# Altium PCB g96-44.PcbDoc
Units mil, origin at the board's own origin, x right, y up, seen from the top; angles counter-clockwise.
Board outline 8107 x 3936 mil, 2 copper layers (Top Layer, Bottom Layer); 65 components, 89 nets, 238 pads, 0 vias.
Unrouted connection lines stored in the file: 39.
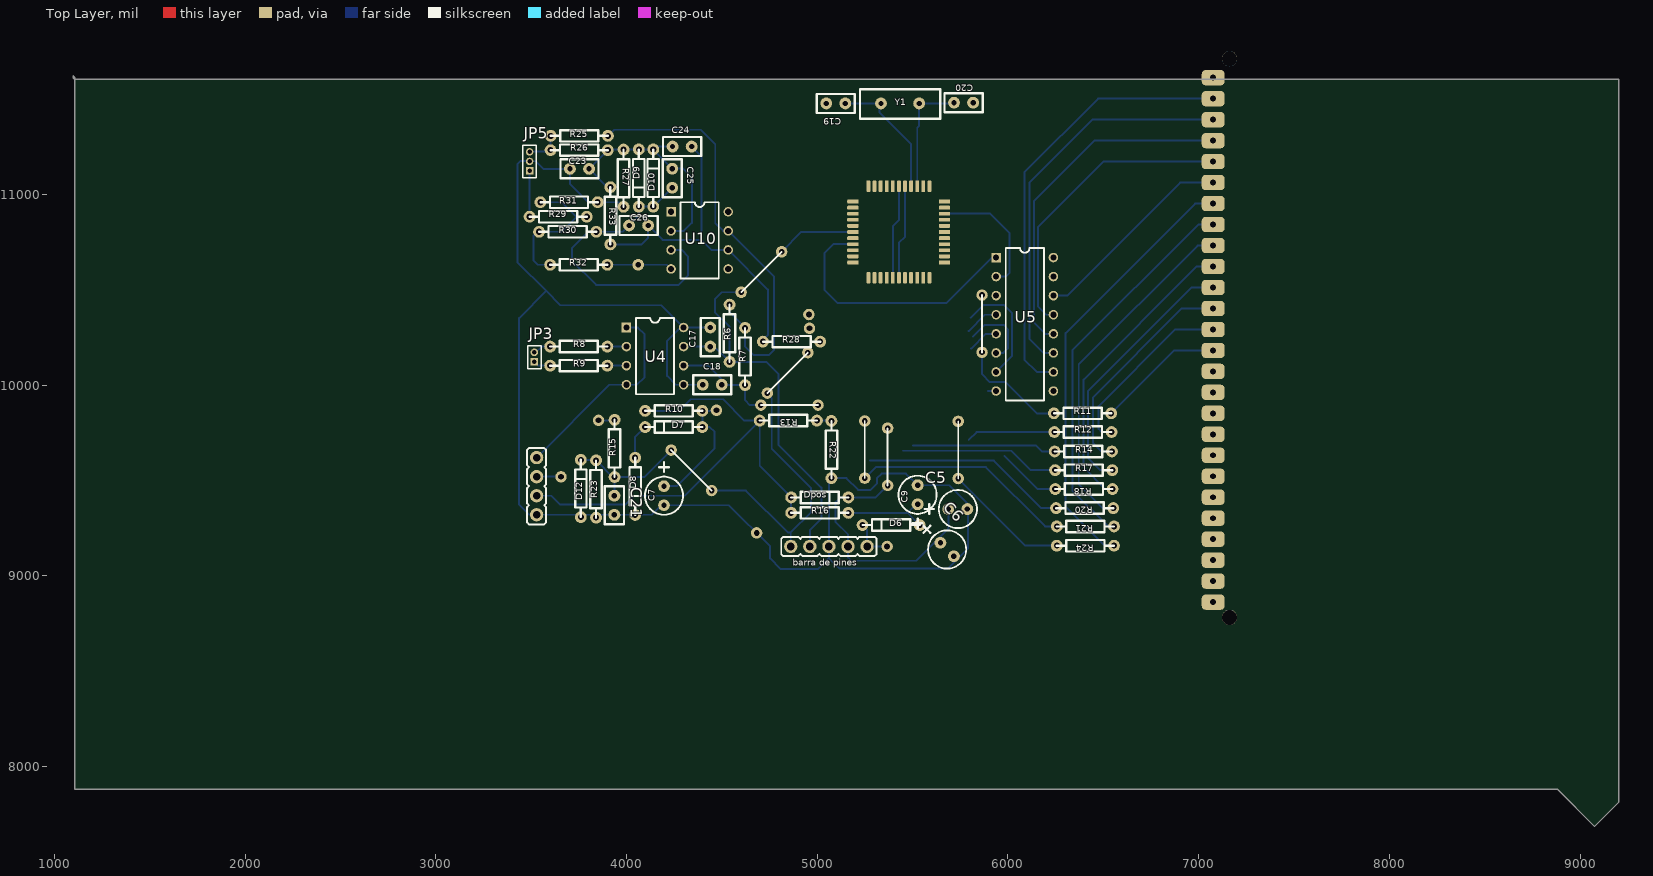
[diagram p0: Top Layer view]
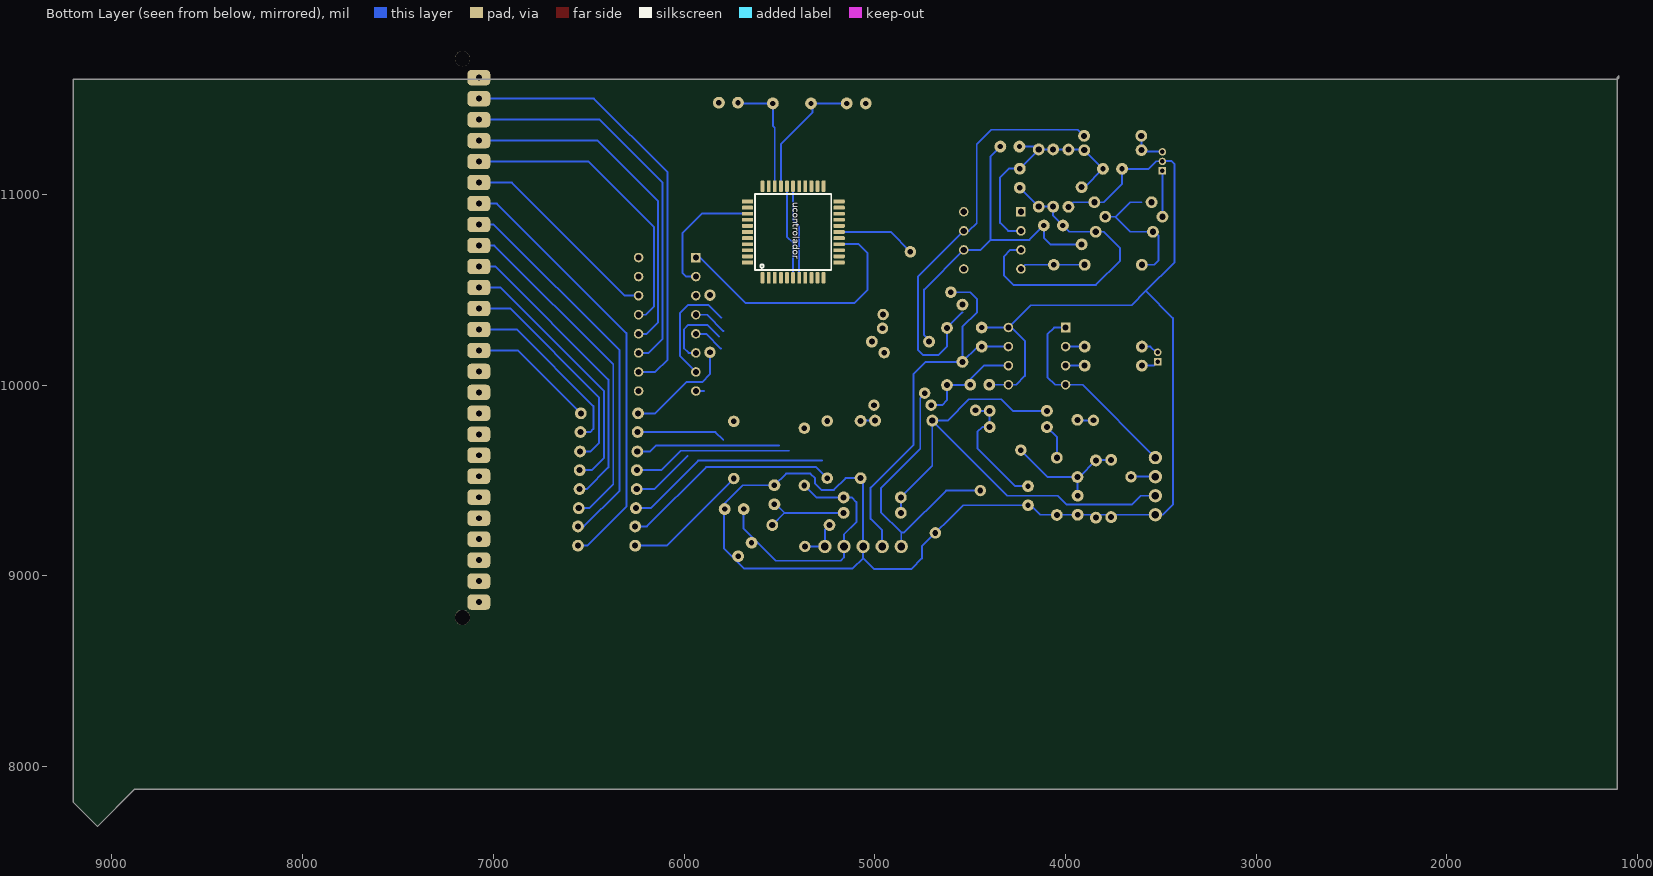
[diagram p1: Bottom Layer view, seen from below]

## Layer stack, top to bottom
Top Layer: signal copper 1.4
Dielectric: dielectric 12.6, FR-4, Dk 4.8
Bottom Layer: signal copper 1.4

## Board outline
1097,11622 1106,11613 1106,7882 8880,7882 9076,7686 9204,7814 9204,11603 1106,11603 1097,11612

## Design rules (kind name [scope] priority, off if disabled: settings)
Clearance [All] p1: gap=10
PolygonConnect [All] p1: connectstyle=Relief reliefconductorwidth=10 reliefentries=4 polygonreliefangle="90 Angle"
RoomDefinition N96P96copia [InComponentClass('N96P96copia')] p1: confinementstyle=ConfineIn formatcopy=TRUE lockcomponents=FALSE outline 7050,1425 30445,1425 30445,5360 7050,5360
RoutingVias [All] p1: holewidth=28 width=50 viastyle="Through Hole" minholewidth=28 minwidth=50 maxholewidth=28 maxwidth=50
SilkscreenOverComponentPads [All] p1: minsilkscreentomaskgap=10
SolderMaskExpansion [All] p1: expansion=4
TestPointUsage [All] p1: valid=0 allowmultiple=FALSE
Testpoint [All] p1: side=15 testpointundercomponent=TRUE minsize=40 maxsize=100 preferedsize=60 minholesize=0 maxholesize=40 preferedholesize=32 testpointgrid=1 style=1023 order=0-112345678
Width [All] p1: maxlimit=10 minlimit=10 preferedwidth=10
23 further rules are at their usual default settings.

## Components (designator, comment, footprint, x,y, rotation, side; value= is the part's Value field where it differs from the comment)
* "*" "Bornera N96" 7075,8860 r180 top
"barra de pines" "Bornera 5 pines" "barra de pines 1 x 5" 5261,9154 r180 top
C5 "10uFX16V" "CAP 5MM" 5737,9350 r0 top
C6 "10uFX16V" "CAP 5MM" 5681,9138 r315 top
C7 "2.2uFX16V" "CAP 5MM" 4196,9420 r270 top
C9 "1uFX100V" "CAP 5MM" 5526,9425 r90 top
C17 ".1uF" RAD0.1 4439,10202 r90 top
C18 ".1uF" RAD0.1 4499,10002 r180 top
C19 "27pF" RAD0.1 5147,11477 r180 top
C20 "27pF" RAD0.1 5717,11481 r0 top
C21 ".1uF" RAD0.1 3936,9420 r270 top
C23 ".1uF" RAD0.1 3803,11134 r180 top
C24 "47pF" RAD0.1 4241,11251 r0 top
C25 ".1uF" RAD0.1 4239,11135 r270 top
C26 "47pF" RAD0.1 4013,10837 r0 top
D6 "1N4148" "DIODE 0.3" 5537,9266 r180 top
D7 "1N4148" "DIODE 0.3" 4397,9780 r180 top
D8 "1N4148" "DIODE 0.3" 4045,9619 r270 top
D9 "1N4148" "DIODE 0.3" 4064,11236 r270 top
D10 "1N4148" "DIODE 0.3" 4140,10936 r90 top
D12 "4V7" "DIODE 0.3" 3760,9308 r90 top
Dpos "DIODE" "DIODE 0.3" 4863,9411 r0 top
JP3 "MHDR1X2" MHDR1X2 3516,10122 r90 top
JP5 "MHDR1X3" MHDR1X3 3491,11123 r90 top
R6 "10K" AXIAL0.3 4540,10122 r90 top
R7 "10K" AXIAL0.3 4621,10000 r90 top
R8 "1K" AXIAL0.3 3599,10202 r0 top
R9 "1K" AXIAL0.3 3599,10102 r0 top
R10 "*" AXIAL0.3 4397,9865 r180 top
R11 "*" AXIAL0.3 6241,9852 r0 top
R12 "*" AXIAL0.3 6243,9754 r0 top
R13 "*" AXIAL0.3 4998,9814 r180 top
R14 "*" AXIAL0.3 6245,9652 r0 top
R15 "*" AXIAL0.3 3937,9518 r90 top
R16 "*" AXIAL0.3 5163,9330 r180 top
R17 "*" AXIAL0.3 6247,9554 r0 top
R18 "*" AXIAL0.3 6248,9455 r0 top
R20 "*" AXIAL0.3 6252,9355 r0 top
R21 "*" AXIAL0.3 6256,9259 r0 top
R22 "*" AXIAL0.3 5074,9512 r90 top
R23 "*" AXIAL0.3 3840,9305 r90 top
R24 "*" AXIAL0.3 6256,9158 r0 top
R25 "*" AXIAL0.3 3602,11307 r0 top
R26 "*" AXIAL0.3 3901,11232 r180 top
R27 "*" AXIAL0.3 3984,10935 r90 top
R28 "*" AXIAL0.3 4715,10228 r0 top
R29 "*" AXIAL0.3 3491,10883 r0 top
R30 "*" AXIAL0.3 3541,10804 r0 top
R31 "*" AXIAL0.3 3548,10959 r0 top
R32 "*" AXIAL0.3 3899,10631 r180 top
R33 "*" AXIAL0.3 3915,11038 r270 top
U4 "CNY74-2" DIP8 3999,10302 r0 top
U5 "ULN2003" DIP16 5938,10669 r0 top
U10 "OP07" DIP8 4233,10909 r0 top
ucontrolador "PIC16F887" PIC16F887 5588,10563 r180 bottom
Y1 "4MHz" XTAL1 5334,11477 r0 top
? "Comment" "JUMPER 300" 5739,9510 r90 top
? "Comment" "JUMPER 300" 5249,9512 r90 top
? "Comment" "JUMPER 300" 5864,10172 r90 top
? "Comment" "JUMPER 300" 5004,9895 r180 top
? "Comment" "JUMPER 300" 5369,9774 r270 top
? "Comment" "JUMPER 300" 4601,10487 r45 top
? "Comment" "BARRA DE PINES 1 X 4" 3528,9620 r270 top
? "Comment" "JUMPER 300" 4738,9958 r45 top
? "Comment" "JUMPER 300" 4446,9447 r135 top

## Footprints (in the part's own frame and the unit in brackets; to place one, negate y for a bottom-side part, rotate by r counter-clockwise, add the part's x,y. Pads: shape width x height; smd on the part's side, far side on the other; paste and mask are expansions set on the pad)
AXIAL0.3 [mil]
  round 62 hole 32: 1(0,0) 2(300,0)
  silkscreen extent 0,-30 300,30
"BARRA DE PINES 1 X 4" [mil]
  round 70 hole 40: 1(0,0) 2(100,0) 3(200,0) 4(300,0)
  silkscreen extent -50,-50 350,50
"barra de pines 1 x 5" [mil]
  round 70 hole 40: 1(0,0) 2(100,0) 3(200,0) 4(300,0) 5(400,0)
  silkscreen extent -50,-50 450,50
"Bornera N96" [mil]
  rrect50% 120x80 hole 31: 1(-1,-2) 2(-1,-112) 3(-1,-222) 4(-1,-332) 5(-1,-442) 6(-1,-552) 7(-1,-662) 8(-1,-772) 9(-1,-882) 10(-1,-992) 11(-1,-1102) 12(-1,-1212) 13(-1,-1322) 14(-1,-1432) 15(-1,-1542) 16(-1,-1652) 17(-1,-1762) 18(-1,-1872) 19(-1,-1982) 20(-1,-2092) 21(-1,-2202) 22(-1,-2312) 23(-1,-2422) 24(-1,-2532) 25(-1,-2642) 26(-1,-2752)
"CAP 5MM" [mil]
  round 62 hole 28: 1(-50,0) 2(50,0)
  silkscreen extent -175,-100 100,100
"DIODE 0.3" [mil]
  round 62 hole 32: 1(0,0) 2(300,0)
  silkscreen extent 0,-30 300,30
DIP8 [mil]
  rect 50x50 hole 32: 1(0,0)
  round 50 hole 32: 2(0,-100) 3(0,-200) 4(0,-300) 5(300,-300) 6(300,-200) 7(300,-100) 8(300,0)
  silkscreen extent 50,-350 250,50
DIP16 [mil]
  rect 50x50 hole 32: 1(0,0)
  round 50 hole 32: 2(0,-100) 3(0,-200) 4(0,-300) 5(0,-400) 6(0,-500) 7(0,-600) 8(0,-700) 9(300,-700) 10(300,-600) 11(300,-500) 12(300,-400) 13(300,-300) 14(300,-200) 15(300,-100) 16(300,0)
  silkscreen extent 50,-750 250,50
"JUMPER 300" [mil]
  round 60 hole 30: 1(0,0) 2(300,0)
  silkscreen extent 0,0 300,0
MHDR1X2 [mm] "Connector; Header; 2 Position"
  rect 1x1 hole 0.6: 1(0,0)
  round 1 hole 0.6: 2(1.27,0)
  silkscreen extent -0.9,-0.9 2.17,0.9
MHDR1X3 [mm] "Connector; Header; 3 Position"
  rect 1x1 hole 0.6: 1(0,0)
  round 1 hole 0.6: 2(1.27,0) 3(2.54,0)
  silkscreen extent -0.9,-0.9 3.44,0.9
PIC16F887 [mil]
  rrect50% 20x60 all layers, no hole: 1(0,0) 2(32,0) 3(64,0) 4(96,0) 5(128,0) 6(160,0) 7(192,0) 8(224,0) 9(256,0) 10(288,0) 11(320,0) 23(320,480) 24(288,480) 25(256,480) 26(224,480) 27(192,480) 28(160,480) 29(128,480) 30(96,480) 31(64,480) 32(32,480) 33(0,480)
  rrect50% 60x20 all layers, no hole: 12(401,80) 13(401,112) 14(401,144) 15(401,176) 16(401,208) 17(401,240) 18(401,272) 19(401,304) 20(401,336) 21(401,368) 22(401,400) 34(-79,400) 35(-79,368) 36(-79,336) 37(-79,304) 38(-79,272) 39(-79,240) 40(-79,208) 41(-79,176) 42(-79,144) 43(-79,112) 44(-79,80)
  silkscreen extent -40,40 360,440
RAD0.1 [mil]
  round 62 hole 28: 1(0,0) 2(100,0)
  silkscreen extent -50,-50 150,50
XTAL1 [mil]
  round 62 hole 28: 1(0,0) 2(200,0)
  silkscreen extent -110,-80 310,75

## Part data
* "barra de pines": library part PIC16F887
C5 C6 C7 C9: library part CAPACITOR, "Capacitor"
C17 C18 C19 C20 C21 C23 C24 C25 C26: library part CAP
D6 D7 D8 D9 D10: library part DIODE, "Diode"
D12: library part ZENER3, "Diodo Zener"
Dpos: "Diode"
JP3: "Header, 2-Pin"
JP5: "Header, 3-Pin"
R6 R7 R8 R9 R10 R11 R12 R13 R14 R15 R16 R17 R18 R20 R21 R22 R23 R24 R25 R26 R27 R28 R29 R30 R31 R32 R33: library part RES1
U4: "Optoisolator"
U5: library part ULN2003A, "Array Transistores"
Y1: library part CRYSTAL, "Crystal"

## Free pads (board coordinates)
  round 60 hole 30: 0(4959,10298) 1(4471,9868) 2(3656,9519) 3(4061,10631) 4(5366,9154) 5(4956,10370) 6(3853,9815) 10(4682,9225)
  round 80 hole 80: 86(7162,8782) 87(7162,11712)

## Nets (pads, with @x,y where several pads share a name; then routed paths per layer and width w, separated by ;. In a path a pad name is that pad's centre, name@x,y a point inside that pad or via, vN(x,y) a via of type N, cw(c..) or ccw(c..) an arc to the next point about the centre after c; other vN are vias at no path point)
+12V: ?.1@3528,9620 U4.1 U4.4 | length 1075.3
  Bottom Layer w10: ?.1@3528,9620 3910,10002 U4.4 4054,10002 4094,10042 4094,10267 4059,10302 U4.1
+VCC: ?.3 Dpos.1 R6.2 R7.2 R10.2 R13.2 R16.2 R25.2 U10.7 | length 4820.2
  Bottom Layer w10: ?.3 3605,9420 3652,9373 3994,9373 4041,9420 4304,9420 R13.2 ; R25.2 3934,11339 4389,11339 4465,11263 4465,10850 4506,10809 U10.7 4772,10570 4772,10184 4745,10157 4666,10157 4621,10202 R7.2 4540,10381 ; R10.2 4275,9865 4336,9926 4506,9926 4618,9814 R13.2 ; R16.2 Dpos.1 4698,9576 R13.2
-VCC: ?.2@3528,9520 pad.2 pad.3 R32.1 U10.4 | length 470.1
  Bottom Layer w10: ?.2@3528,9520 pad.2@3655,9520 ; R32.1 4211,10631 U10.4
AN0: C7.1 D7.1 pad.0 pad.1 R10.1 ucontrolador.19 | length 664.4
  Bottom Layer w10: C7.1 4263,9470 4461,9668 4461,9755 4436,9780 D7.1 R10.1 pad.1@4468,9865
AN1: R28.2 ucontrolador.20 | length 15.6
  Bottom Layer w10: R28.2@5004,10242 R28.2@5015,10253
CONT: ?.1@5004,9895 ?.2@4704,9895 C18.1 R7.1 U4.6 ucontrolador.8 | length 553.4
  Bottom Layer w10: U4.6 4427,10102 4499,10030 C18.1 4501,10000 R7.1 4621,9921 4647,9895 ?.2@4704,9895
"CTRL 485": ucontrolador.27
"DIG 0": U5.7 ucontrolador.40 | length 607.8
  Bottom Layer w10: 5804,10353 5872,10421 5979,10421 6022,10378 6022,10153 U5.7
"DIG 1": U5.6 ucontrolador.37 | length 389.7
  Bottom Layer w10: 5817,10255 5878,10316 5977,10316 6000,10293 6000,10193 5976,10169 U5.6
"DIG 2": U5.5 ucontrolador.35 | length 164.3
  Bottom Layer w10: 5806,10191 5884,10269 U5.5
"DIG 3": U5.4 ucontrolador.38 | length 180.6
  Bottom Layer w10: 5793,10283 5879,10369 U5.4
"DIG 4": U5.3 ucontrolador.14
"DIG 5": ucontrolador.11
"DIG 6": ucontrolador.10
"DIG 7": ucontrolador.9
"DIG 8": ucontrolador.41
"DIG 9": ucontrolador.25
"DIG 10": ucontrolador.42
"DIG 11": ucontrolador.39
GND: "barra de pines.3" ?.4 C5.2 C6.2 C7.2 C9.2 C17.2 C18.2 C19.2 C20.2 C21.2 C23.2 D8.2 D12.1 JP5.2 pad.10 R22.1 R23.1 R27.1 R31.2 U4.5 U4.8 U5.8 ucontrolador.6 ucontrolador.29 | length 8777.9
  Bottom Layer w10: JP5.2 3488,11176 3446,11176 3427,11157 3427,10645 3578.35,10493.65 ; JP5.2@3491,11174 3524,11174 3564,11134 C23.2 3703,11055 3799,10959 3902,10959 3960,10959 R27.1 ; C18.2 U4.5 4258,10002 4212,10048 4212,10232 4282,10302 U4.8 ; C17.2 U4.8 ; ucontrolador.6 5428,10746 5460,10778 ucontrolador.29 ; 5894,9969 U5.8 ; 3578.35,10493.65 3436,10351.31 3436,9699 3436,9373 3489,9320 ?.4 4132,9320 4182,9370 C7.2 4536,9370 4752,9154 4752,9091 4807,9036 5004,9036 5061,9093 ; 3578.35,10493.65 3653,10419 4182,10419 U4.8 ; 5061,9093 5061,9154 5061,9499 R22.1 5153,9512 5214,9451 5279,9451 5312,9484 5312,9511 5337,9536 5465,9536 C9.2 5692,9475 5790,9377 5790,9143 5686,9039 5115,9039 5061,9093
MCLR: "barra de pines.1" D6.2 pad.4 pad.5 ucontrolador.18 | length 226.9
  Bottom Layer w10: D6.2 5261,9242 5261,9154 pad.4
Net*_6: *.6
Net*_7: *.7
Net*_8: *.8
Net*_9: *.9
Net*_10: *.10
Net*_11: *.11
Net*_12: *.12
Net*_13: *.13 R11.2 | length 671.7
  Bottom Layer w10: R11.2 6871,10182 *.13
Net*_14: *.14 R12.2 | length 962.1
  Bottom Layer w10: R12.2 6491,9754 6475,9770 6475,9890 6877,10292 *.14
Net*_15: *.15 R14.2 | length 1181.1
  Bottom Layer w10: R14.2 6490,9652 6445,9697 6445,9935 6912,10402 *.15
Net*_16: *.16 R17.2 | length 1385.1
  Bottom Layer w10: R17.2 6485,9554 6419,9620 6419,9967 6964,10512 *.16
Net*_17: *.17 R18.2 | length 1585.4
  Bottom Layer w10: R18.2 6509,9455 6396,9568 6396,10029 6989,10622 *.17
Net*_18: *.18 R20.2 | length 1824.8
  Bottom Layer w10: R20.2 6496,9355 6371,9480 6371,10109 6994,10732 *.18
Net*_19: *.19 R21.2 | length 2042.8
  Bottom Layer w10: R21.2 6525,9259 6338,9446 6338,10182 6998,10842 *.19
Net*_20: *.20 R24.2 | length 2304.2
  Bottom Layer w10: R24.2 6507,9158 6302,9363 6302,10273 6981,10952 *.20
Net*_21: *.21 U5.14 | length 1083.6
  Bottom Layer w10: U5.14 6310,10469 6903,11062 *.21
Net*_22: *.22 U5.13 | length 1576.1
  Bottom Layer w10: U5.13 6200,10369 6158,10411 6158,10830 6500,11172 *.22
Net*_23: *.23 U5.12 | length 1834.2
  Bottom Layer w10: U5.12 6196,10269 6136,10329 6136,10965 6453,11282 *.23
Net*_24: *.24 U5.11 | length 2076.9
  Bottom Layer w10: U5.11 6185,10169 6112,10242 6112,11062 6442,11392 *.24
Net*_25: *.25 U5.10 | length 2310.2
  Bottom Layer w10: U5.10 6151,10069 6086,10134 6086,11115 6473,11502 *.25
"Netbarra de pines_2": "barra de pines.2" ?.1@5369,9774 ?.2@5369,9474 C5.1 C6.1 Dpos.2 ucontrolador.7 ucontrolador.28 | length 1824.1
  Bottom Layer w10: ?.2@5369,9474 5306,9411 Dpos.2 5121,9411 5096,9386 5096,9282 5161,9217 5161,9154 5161,9097 5179,9079 5518,9079 5687,9248 C5.1 ; ucontrolador.7 5396,10833 5428,10865 ucontrolador.28
NetC1_1: 
NetC3_2: 
NetC9_1: C9.1 D6.1 R16.1 | length 472.1
  Bottom Layer w10: R16.1 5473,9330 ; C9.1 5518,9375 5473,9330 ; D6.1 5473,9330
NetC13_1: 
NetC13_2: 
NetC19_1: C19.1 ucontrolador.30 Y1.1 | length 682.3
  Bottom Layer w10: C19.1 Y1.1 ; Y1.1@5327,11470 5327,11428 5492,11263 ucontrolador.30
NetC20_1: C20.1 ucontrolador.31 Y1.2 | length 612.1
  Bottom Layer w10: ucontrolador.31 5524,11350 5534,11360 Y1.2 C20.1@5708,11477
NetC23_1: C23.1 C24.1 C25.1 D9.1 D10.2 R26.1 R27.2 R33.1 U10.2 | length 1238.8
  Bottom Layer w10: R33.1@3899,11038 C23.1 R26.1 3905,11236 D9.1 D10.2 ; U10.2 4300,10809 4342,10851 4342,11090 4297,11135 C25.1 4155,11219 4155,11251 C24.1
NetC24_2: C24.2 C26.2 R28.1 R33.2 U10.6 | length 1836.8
  Bottom Layer w10: R33.2 4079,10738 4113,10772 C26.2 4189,10761 4392,10761 ; C24.2 4392,11200 4392,10761 ; R28.1@4711,10232 4741,10262 4741,10501 U10.6 4444,10709 4392,10761
NetC25_2: C25.2 C26.1 D9.2 D10.1 R30.2 U10.3 | length 1637.7
  Bottom Layer w10: U10.3 4288,10709 4323,10674 4323,10575 4273,10525 3840,10525 3713,10652 3713,10717 3800,10804 3903,10804 3980,10804 C26.1 4064,10888 D9.2 D10.1 C25.2
NetD1_1: 
NetD3_1: 
NetD7_2: D7.2 D8.1 | length 182.5
  Bottom Layer w10: D8.1 4045,9728 D7.2
NetF1_1: 
NetF1_2: 
NetF2_1: 
NetF2_2: 
NetJP1_1: 
NetJP2_1: 
NetJP2_2: 
NetJP3_1: JP3.1 R9.1 | length 91.3
  Bottom Layer w10: JP3.1 3536,10102 R9.1
NetJP3_2: JP3.2 R8.1 | length 95.4
  Bottom Layer w10: JP3.2 3524,10172 3554,10202 R8.1
NetJP4_2: 
NetJP5_1: JP5.1 R29.1 | length 240
  Bottom Layer w10: R29.1 JP5.1
NetJP5_3: JP5.3 R25.1 R26.2 | length 188.7
  Bottom Layer w10: JP5.3@3491,11224 3593,11224 3602,11233 R25.1
NetR8_2: R8.2 U4.2 | length 100
  Bottom Layer w10: R8.2 U4.2
NetR9_2: R9.2 U4.3 | length 100
  Bottom Layer w10: R9.2 U4.3
NetR29_2: R29.2 R30.1 R31.1 R32.2 | length 712.7
  Bottom Layer w10: R32.2 3534,10631 3511,10654 3511,10782 3533,10804 3603,10804 3659,10804 3736.5,10881.5 ; 3602,10959 3659,10959 3735,10883 R29.2
OUT1: U5.2 ucontrolador.36 | length 669.9
  Bottom Layer w10: ucontrolador.36 5907,10899 6007,10799 6007,10587 5989,10569 U5.2
OUT2: U5.1 ucontrolador.15 | length 1389.9
  Bottom Layer w10: ucontrolador.15 5084,10739 5037,10692 5037,10501 5108,10430 5676,10430 5915,10669 U5.1
POFF: pad.6 R15.2 | length 81
  Bottom Layer w10: pad.6 R15.2@3934,9815
POFFIN: "barra de pines.5" ?.1@4446,9447 ?.1@4738,9958 ?.2@4233.87,9659.13 ?.2@4950.13,10170.13 C21.1 D12.2 R15.1 R23.2 ucontrolador.16 | length 2126.1
  Bottom Layer w10: D12.2 3837,9608 R23.2 R15.1@3927,9518 ; C21.1@3937,9421 R15.1 4092.74,9518 ?.2@4233.87,9659.13 ; ?.1@4446,9447 4626,9447 4845,9228 4861,9228 ; ?.1@4721,9972 4761,9932 4761,9665 4967,9459 4967,9334 4861,9228 ; 4861,9154 4861,9228
RL1: U5.15
RL2: U5.16
RST: "barra de pines.4" ?.1@4601,10487 ?.2@4813.13,10699.13 C17.1 R6.1 U4.7 ucontrolador.17 | length 2509.4
  Bottom Layer w10: U4.7 C17.1 4460,10202 R6.1 ; ?.1@4601,10487 4500,10487 4463,10450 4463,10383 4540,10306 R6.1 ; ?.2@4813.13,10699.13 4917,10803 ucontrolador.17 ; 4961,9154 4961,9238 5021,9298 5021,9463 4796,9688 4796,10059 4733,10122 R6.1
RX: ucontrolador.1
"SEG A": ?.1@5864,10172 ?.2@5864,10472 R11.1 ucontrolador.43 | length 576.9
  Bottom Layer w10: ?.1@5864,10172 5864,10057 5905,10016 5987,10016 6151,9852 R11.1
"SEG B": R12.1 ucontrolador.4 | length 466
  Bottom Layer w10: 5794,9713 5835,9754 R12.1
"SEG C": R14.1 ucontrolador.5 | length 755.8
  Bottom Layer w10: 5502,9683 6147,9683 6178,9652 R14.1
"SEG D": R17.1 ucontrolador.24 | length 839.2
  Bottom Layer w10: 5450,9656 6017,9656 6119,9554 R17.1
"SEG E": R18.1 ucontrolador.2 | length 337.7
  Bottom Layer w10: 5982,9628 6155,9455 R18.1
"SEG F": R20.1 ucontrolador.3 | length 1079.1
  Bottom Layer w10: 5276,9604 5926,9604 6175,9355 R20.1
"SEG G": ?.1@5249,9512 ?.2@5249,9812 R21.1 ucontrolador.26 | length 1159.8
  Bottom Layer w10: ?.1@5249,9512 5307,9570 5884,9570 6195,9259 R21.1
"SEG PD": ?.1@5739,9510 ?.2@5739,9810 R24.1 ucontrolador.32 | length 662.8
  Bottom Layer w10: ?.1@5739,9510 6091,9158 R24.1
SWIN: *.26 ucontrolador.23
TX: ucontrolador.44
VREF: R13.1 R22.2 ucontrolador.22 | length 74
  Bottom Layer w10: R13.1 R22.2@5072,9814
pads on no net: *.1 *.2 *.3 *.4 *.5 U5.9 U10.1 U10.5 U10.8 ucontrolador.12 ucontrolador.13 ucontrolador.21 ucontrolador.33 ucontrolador.34

## Silkscreen, mask and mechanical layers (free items; w line width, h text height)
Mechanical 1:
  lines w10: 2752,8497 2752,9247 2852,9247 2852,9427 2752,9427 ; 2752,8499 7162,8487 7242,8487 7242,8782 7162,8782 7162,11712 7242,11712 7242,11986 7142,11986 ; 2752,11974 5312,11981 6316,11981 ; 2753,9428 2753,11046 2853,11046 2853,11226 2753,11226 2753,11973 ; 6312,11984 7162,11986 6962,11986